# EAGLE board eib-128-mech (EAGLE 6.5.0)
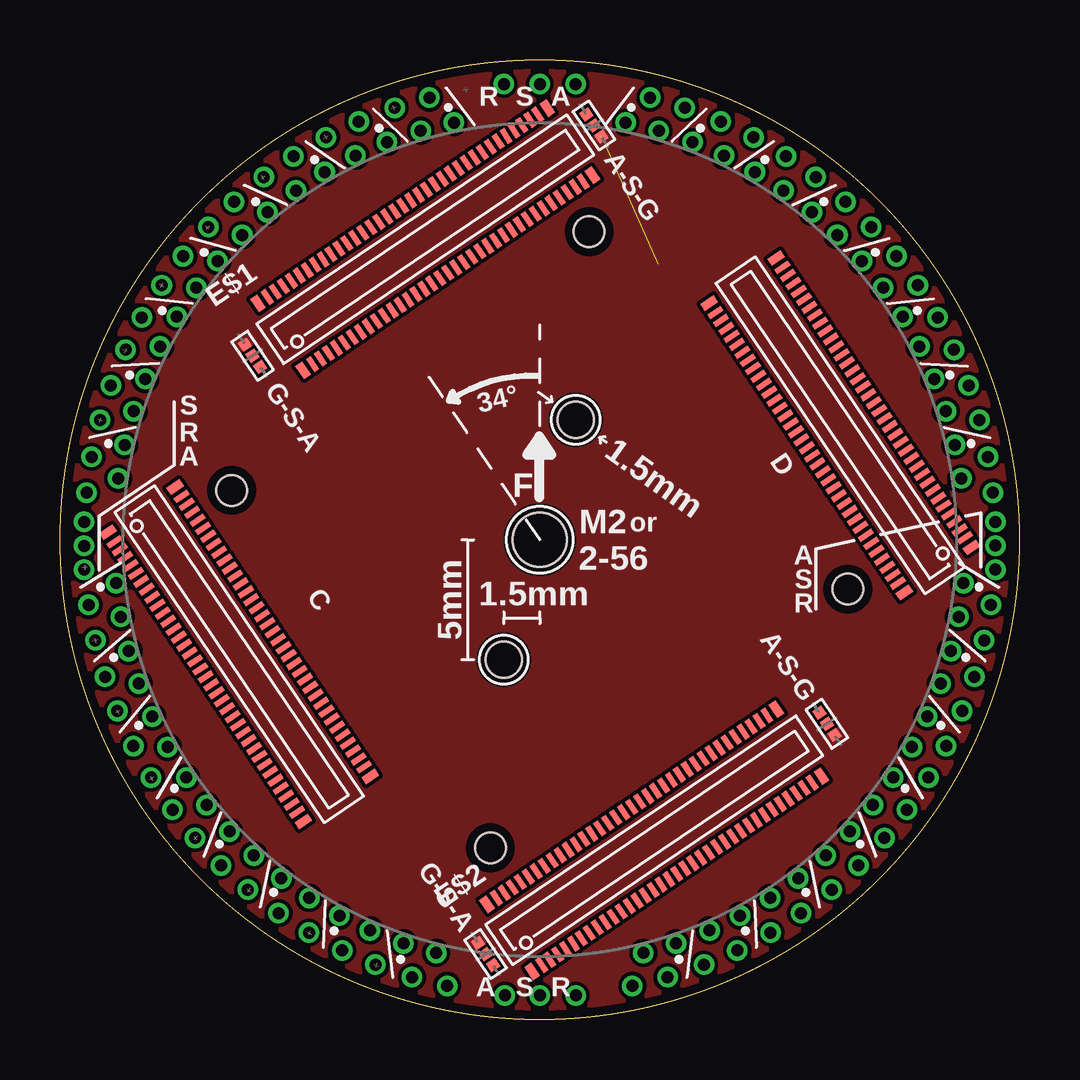
[diagram p0: board, top side]
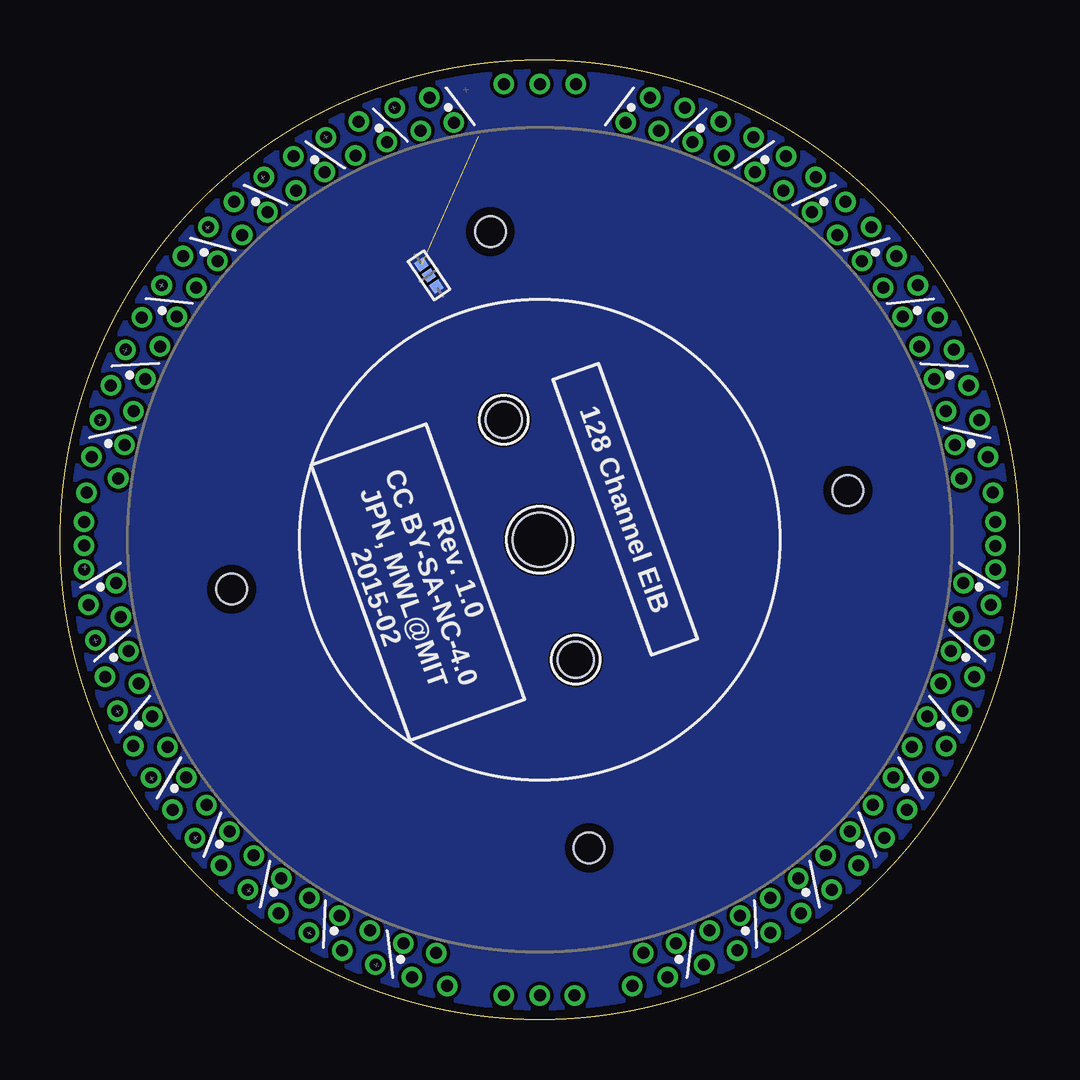
[diagram p1: board, bottom side, seen from below]

Size 40 x 40 mm. Coordinates in mm from the lower left corner, seen from the top.
Outline: circle at 20,20 radius 20
Outline: circle at 20,20 radius 20
Copper layers (1*16): Top 0.0356mm / dielectric 1.5011mm / Bottom 0.0356mm
Design rules "ohs-park-2-layer": minimum track width 6mil, minimum drill 13mil, track to track 6mil, track to pad 6mil, pad to pad 6mil, via to via 6mil, smd to smd 6mil, copper to edge 15mil, drill to drill 6mil, minimum pad ring 7mil, minimum via ring 7mil, stop-mask expansion 4mil, vias tented up to drill 100mil, thermal gap 10mil
Net classes: 1 thick: width 0.102 mm
Holes 1.27 mm at 22.06,32.85 32.85,17.94 17.94,7.15 7.15,22.06

## Footprints (pad centres in the part's own frame; a part is rotated, then mirrored left to right if it is on the bottom)
GOLDPIN_0.5ID_0.7OD = drill 0.5 pad 0.7: P$1 0,0
DF40-70HEAD = smd 0.23 x 0.66: 1 -6.8,-1.685; 2 -6.4,-1.685; 3 -6,-1.685; 4 -5.6,-1.685; 5 -5.2,-1.685; 6 -4.8,-1.685; 7 -4.4,-1.685; 8 -4,-1.685; 9 -3.6,-1.685; 10 -3.2,-1.685; 11 -2.8,-1.685; 12 -2.4,-1.685; 13 -2,-1.685; 14 -1.6,-1.685; 15 -1.2,-1.685; 16 -0.8,-1.685; 17 -0.4,-1.685; 18 0,-1.685; 19 0.4,-1.685; 20 0.8,-1.685; 21 1.2,-1.685; 22 1.6,-1.685; 23 2,-1.685; 24 2.4,-1.685; 25 2.8,-1.685; 26 3.2,-1.685; 27 3.6,-1.685; 28 4,-1.685; 29 4.4,-1.685; 30 4.8,-1.685; 31 5.2,-1.685; 32 5.6,-1.685; 33 6,-1.685; 34 6.4,-1.685; 35 6.8,-1.685; 36 6.8,1.685; 37 6.4,1.685; 38 6,1.685; 39 5.6,1.685; 40 5.2,1.685; 41 4.8,1.685; 42 4.4,1.685; 43 4,1.685; 44 3.6,1.685; 45 3.2,1.685; 46 2.8,1.685; 47 2.4,1.685; 48 2,1.685; 49 1.6,1.685; 50 1.2,1.685; 51 0.8,1.685; 52 0.4,1.685; 53 0,1.685; 54 -0.4,1.685; 55 -0.8,1.685; 56 -1.2,1.685; 57 -1.6,1.685; 58 -2,1.685; 59 -2.4,1.685; 60 -2.8,1.685; 61 -3.2,1.685; 62 -3.6,1.685; 63 -4,1.685; 64 -4.4,1.685; 65 -4.8,1.685; 66 -5.2,1.685; 67 -5.6,1.685; 68 -6,1.685; 69 -6.4,1.685; 70 -6.8,1.685 | smd 0.35 x 0.66: M1 -7.275,-1.685; M2 7.275,-1.685; M3 7.275,1.685; M4 -7.275,1.685
SJ_2_0201 = smd 0.432 x 0.432: 1 -0.559,0; 2 0.559,0; COM 0,0
TETRODE_128_0.5ID_0.7OD = drill 0.5 pad 0.703: 0 0.724,17.743; 1 1.562,18.934; 2 2.14,17.628; 3 3.058,18.748
EIB_MOUNT_A = hole 2.261: 0,0 | hole 1.5: 1.5,5; -1.5,-5

## Placement (x,y rotation side)
AGND_A0  LRG_GP  [GOLDPIN_0.5ID_0.7OD]  21.5,39 0 top
AGND_A1  LRG_GP  [GOLDPIN_0.5ID_0.7OD]  1,18.75 0 top
AGND_B0  LRG_GP  [GOLDPIN_0.5ID_0.7OD]  18.55,1 34 top
AGND_B1  LRG_GP  [GOLDPIN_0.5ID_0.7OD]  39,20.75 34 top
C  DF40HEAD  [DF40-70HEAD]  7.47,15.23 304 top
D  DF40HEAD  [DF40-70HEAD]  32.53,24.77 124 top
E$1  [DF40-70HEAD]  15.23,32.53 34 top
E$2  [DF40-70HEAD]  24.77,7.47 34 top
REF_A0  LRG_GP  [GOLDPIN_0.5ID_0.7OD]  18.5,39 0 top
REF_A1  LRG_GP  [GOLDPIN_0.5ID_0.7OD]  1,19.75 0 top
REF_B0  LRG_GP  [GOLDPIN_0.5ID_0.7OD]  21.5,1 34 top
REF_B1  LRG_GP  [GOLDPIN_0.5ID_0.7OD]  39,19.75 34 top
SHLD_A0  LRG_GP  [GOLDPIN_0.5ID_0.7OD]  20,39 0 top
SHLD_A1  LRG_GP  [GOLDPIN_0.5ID_0.7OD]  1,20.75 0 top
SHLD_B0  LRG_GP  [GOLDPIN_0.5ID_0.7OD]  20,1 34 top
SHLD_B1  LRG_GP  [GOLDPIN_0.5ID_0.7OD]  39,18.75 34 top
SJ_A0  [SJ_2_0201]  22.26,37.27 124 top
SJ_A1  [SJ_2_0201]  8.03,27.67 304 top
SJ_A2  [SJ_2_0201]  24.62,31.02 124 bottom
SJ_B0  [SJ_2_0201]  17.74,2.73 304 top
SJ_B1  [SJ_2_0201]  31.97,12.33 124 top
TET0  0  [TETRODE_128_0.5ID_0.7OD]  20,20 350.7 bottom
TET1  1  [TETRODE_128_0.5ID_0.7OD]  20,20 341.3 bottom
TET2  2  [TETRODE_128_0.5ID_0.7OD]  20,20 332 bottom
TET3  3  [TETRODE_128_0.5ID_0.7OD]  20,20 322.6 bottom
TET4  4  [TETRODE_128_0.5ID_0.7OD]  20,20 313.2 bottom
TET5  5  [TETRODE_128_0.5ID_0.7OD]  20,20 303.9 bottom
TET6  6  [TETRODE_128_0.5ID_0.7OD]  20,20 294.5 bottom
TET7  7  [TETRODE_128_0.5ID_0.7OD]  20,20 285.2 bottom
TET8  8  [TETRODE_128_0.5ID_0.7OD]  20,20 266.5 bottom
TET9  9  [TETRODE_128_0.5ID_0.7OD]  20,20 257.2 bottom
TET10  10  [TETRODE_128_0.5ID_0.7OD]  20,20 247.8 bottom
TET11  11  [TETRODE_128_0.5ID_0.7OD]  20,20 238.4 bottom
TET12  12  [TETRODE_128_0.5ID_0.7OD]  20,20 229.1 bottom
TET13  13  [TETRODE_128_0.5ID_0.7OD]  20,20 219.7 bottom
TET14  14  [TETRODE_128_0.5ID_0.7OD]  20,20 210.4 bottom
TET15  15  [TETRODE_128_0.5ID_0.7OD]  20,20 201 bottom
TET16  16  [TETRODE_128_0.5ID_0.7OD]  20,20 201 top
TET17  17  [TETRODE_128_0.5ID_0.7OD]  20,20 210.4 top
TET18  18  [TETRODE_128_0.5ID_0.7OD]  20,20 219.7 top
TET19  19  [TETRODE_128_0.5ID_0.7OD]  20,20 229.1 top
TET20  20  [TETRODE_128_0.5ID_0.7OD]  20,20 238.4 top
TET21  21  [TETRODE_128_0.5ID_0.7OD]  20,20 247.8 top
TET22  22  [TETRODE_128_0.5ID_0.7OD]  20,20 257.2 top
TET23  23  [TETRODE_128_0.5ID_0.7OD]  20,20 266.5 top
TET24  24  [TETRODE_128_0.5ID_0.7OD]  20,20 285.2 top
TET25  25  [TETRODE_128_0.5ID_0.7OD]  20,20 294.5 top
TET26  26  [TETRODE_128_0.5ID_0.7OD]  20,20 303.9 top
TET27  27  [TETRODE_128_0.5ID_0.7OD]  20,20 313.2 top
TET28  28  [TETRODE_128_0.5ID_0.7OD]  20,20 322.6 top
TET29  29  [TETRODE_128_0.5ID_0.7OD]  20,20 332 top
TET30  30  [TETRODE_128_0.5ID_0.7OD]  20,20 341.3 top
TET31  31  [TETRODE_128_0.5ID_0.7OD]  20,20 350.7 top
U$1  [EIB_MOUNT_A]  20,20 0 top

## Library data of the parts
AGND_A0 AGND_A1 AGND_B0 AGND_B1 C D E$1 E$2 REF_A0 REF_A1 REF_B0 REF_B1 SHLD_A0 SHLD_A1 SHLD_B0 SHLD_B1 SJ_A0 SJ_A1 SJ_A2 SJ_B0 SJ_B1 TET0 TET1-TET31 U$1 = jonnew

## Nets
GND: SJ_A0.1 SJ_A1.1 SJ_A2.1 SJ_A2.2 SJ_B0.1 SJ_B1.1
REF_A0: REF_A0.P$1
REF_A1: REF_A1.P$1
REF_B0: REF_B0.P$1
REF_B1: REF_B1.P$1

## Tracks (layer width: path | path; a pad name or v marks a point on that pad's centre or on a via)
GND  (1 unrouted)
  pour Top (no thermals): 13.15,-15.26 -15.26,26.85 26.85,55.26 55.26,13.15
  pour Bottom (no thermals): 13.15,-15.26 -15.26,26.85 26.85,55.26 55.26,13.15

## Text on the board
tPlace: R | S | A | A-S-G | S | G-S-A | 34° | A | R | A | S | R | A-S-G | G-S-A | A | S | R
bPlace: 128 Channel EIB | Rev. 1.0 / CC BY-SA-NC-4.0 / JPN, MWL@MIT / 2015-02